# Altium PCB NE555DWTZD.PcbDoc
Units mil, origin at the board's own origin, x right, y up, seen from the top; angles counter-clockwise.
Board outline 6000 x 4000 mil, 2 copper layers (Top Layer, Bottom Layer); 8 components, 10 nets, 24 pads, 0 vias.
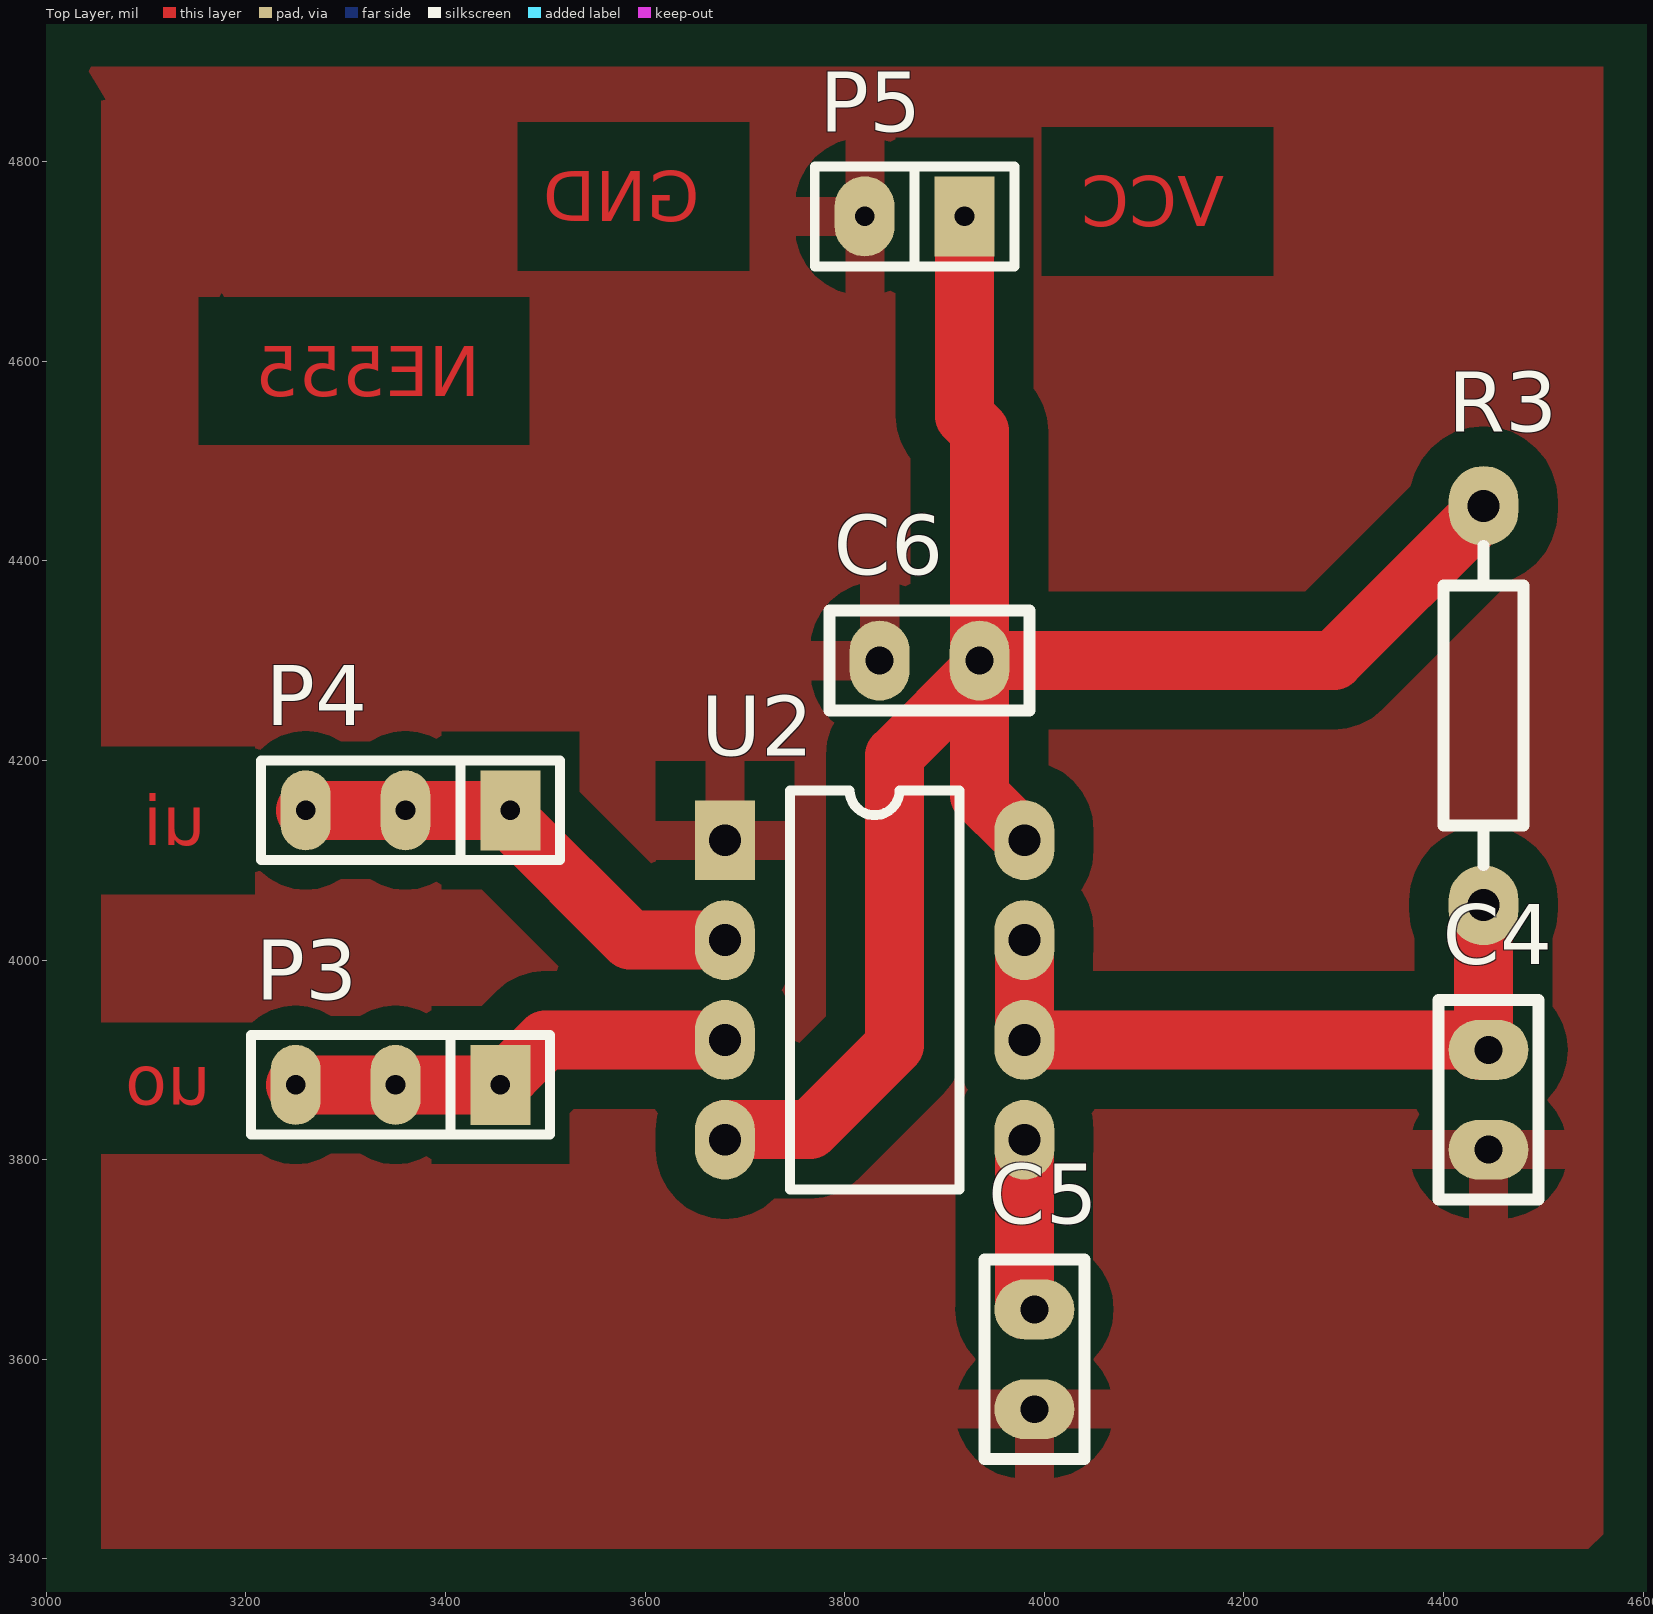
[diagram p0: Top Layer view]
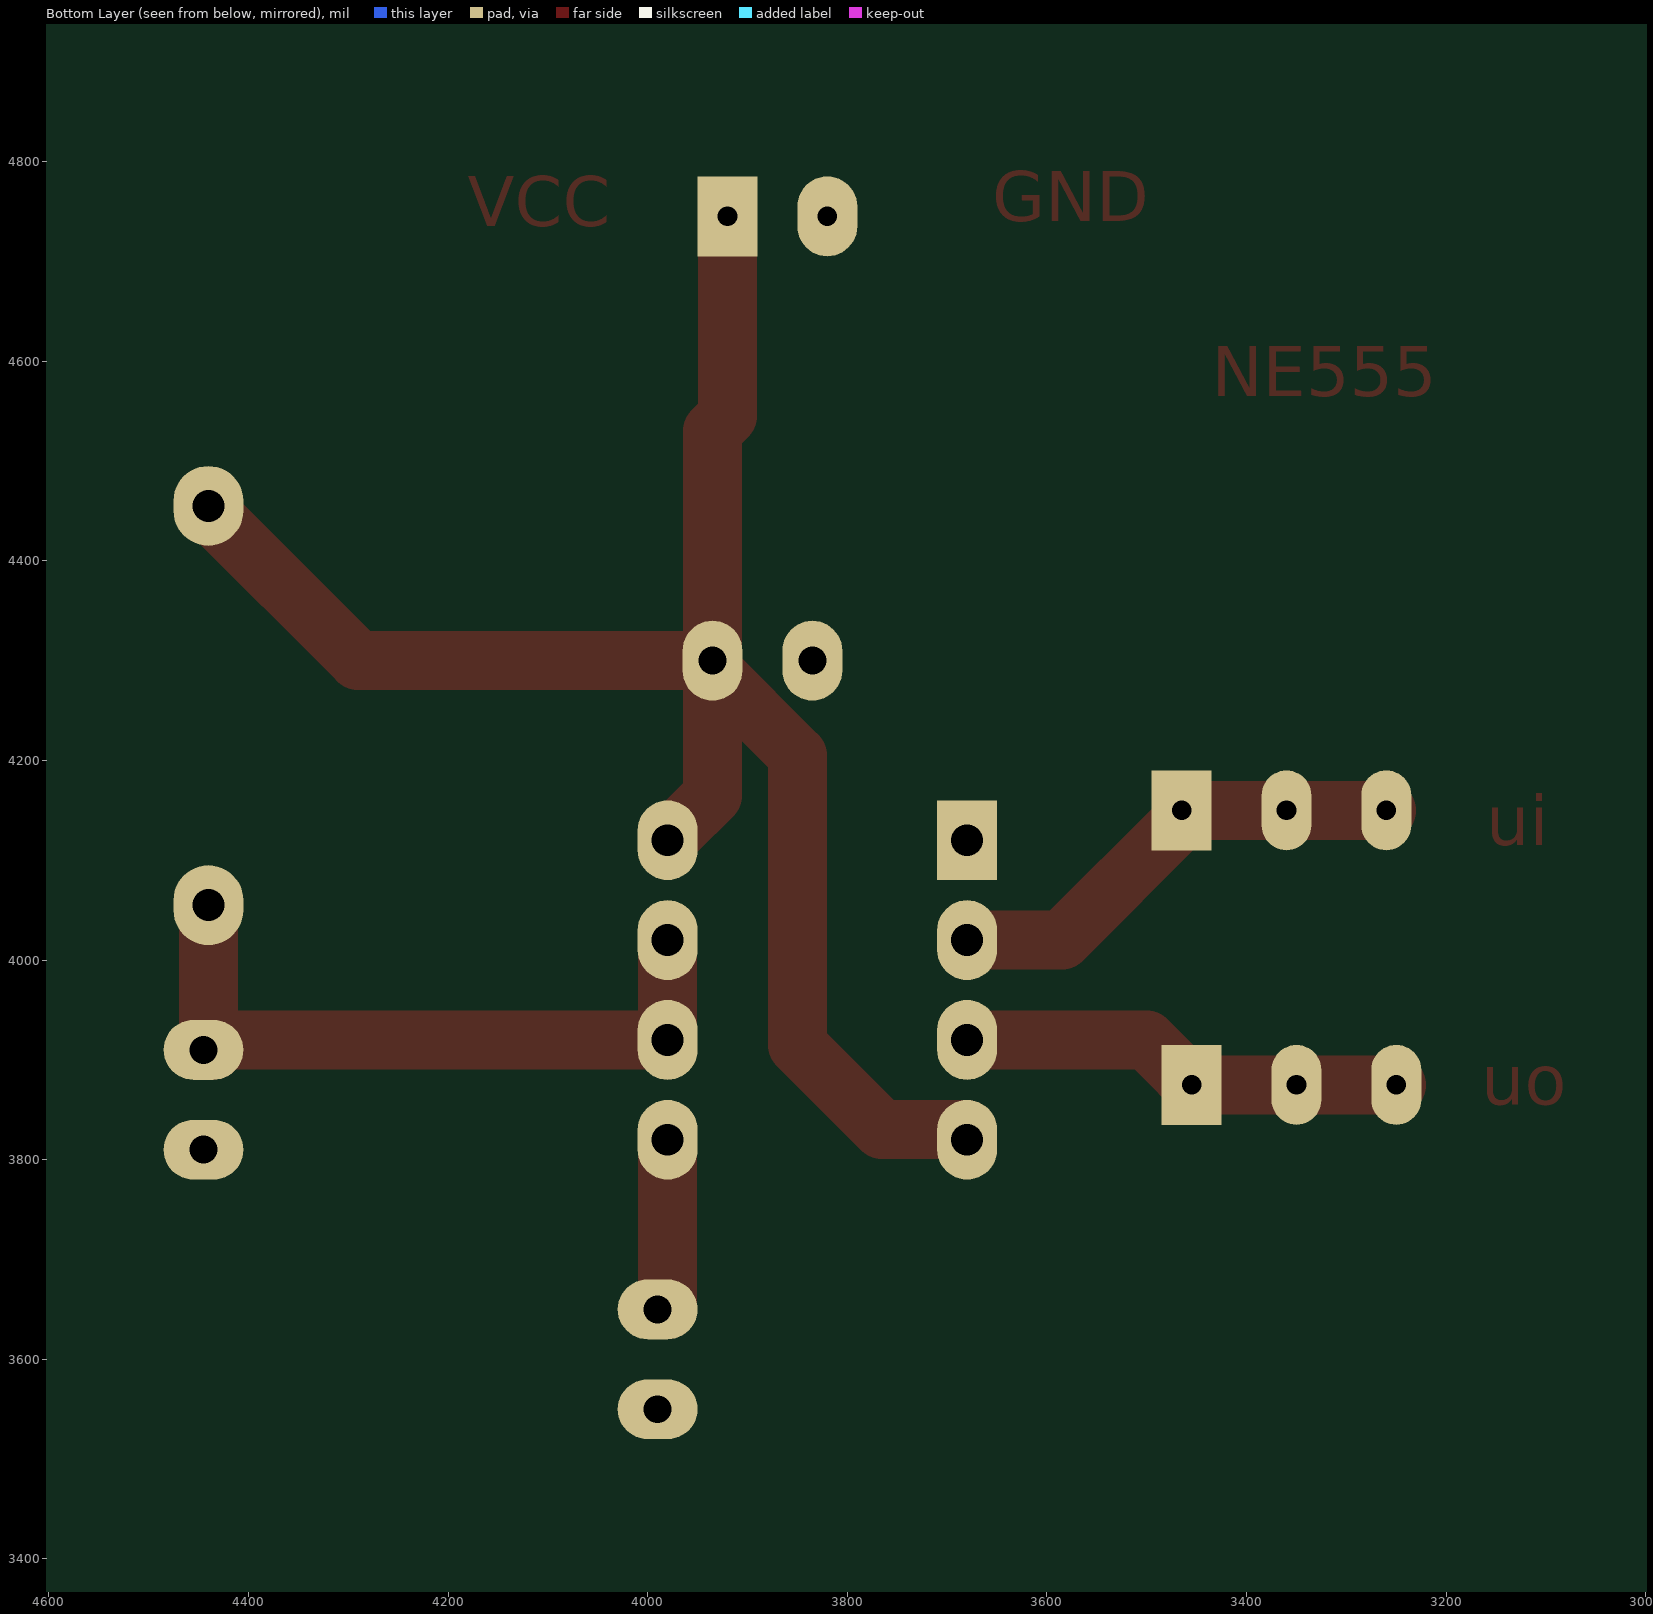
[diagram p1: Bottom Layer view, seen from below]

## Layer stack, top to bottom
Top Solder: solder mask 0.4, Solder Resist, Dk 3.5
Top Layer: signal copper 1.4
Dielectric 1: dielectric 12.6, FR-4, Dk 4.8
Bottom Layer: signal copper 1.4
Bottom Solder: solder mask 0.4, Solder Resist, Dk 3.5

## Board outline
1000,1000 7000,1000 7000,5000 1000,5000

## Design rules (kind name [scope] priority, off if disabled: settings)
Clearance [All] p1: gap=39.37 ignorepadtopadclearanceinfootprint=FALSE
PolygonConnect [All] p1: connectstyle=Relief reliefconductorwidth=39.37 reliefentries=4 polygonreliefangle="90 Angle" airgapwidth=39.37
RoutingVias [All] p1: holewidth=28 width=50 viastyle="Through Hole" minholewidth=28 minwidth=50 maxholewidth=28 maxwidth=50
SolderMaskExpansion [All] p1: expansion=4 istentingtop=FALSE
Width [All] p1: maxlimit=78.74 minlimit=10 preferedwidth=59.06
30 further rules are at their usual default settings.

## Components (designator, comment, footprint, x,y, rotation, side; value= is the part's Value field where it differs from the comment)
C4 "CAP" RAD0.1 4445,3860 r270 top
C5 "0.01u" RAD0.1 3990,3600 r270 top
C6 "104" RAD0.1 3885,4300 r180 top
P3 "3pin" 3PIN排针 3455,3875 r180 top
P4 "3pin" 3PIN排针 3465,4150 r180 top
P5 "2pin" 2pin针 3920,4745 r180 top
R3 "RES" AXIAL0.4 4440,4255 r90 top
U2 "NE555" 8pin座 3680,4120 r0 top

## Footprints (in the part's own frame and the unit in brackets; to place one, negate y for a bottom-side part, rotate by r counter-clockwise, add the part's x,y. Pads: shape width x height; smd on the part's side, far side on the other; paste and mask are expansions set on the pad)
2pin针 [mil]
  rect 60x80 hole 19.68: 1(0,0)
  oval 60x80 hole 19.68: 2(100,0)
  silkscreen extent -50,-50 150,50
3PIN排针 [mil]
  rect 60x80 hole 19.68: 1(0,0)
  oval 50x80 hole 19.68: 2(105,0) 3(205,0)
  silkscreen extent -50,-50 250,50
8pin座 [mil]
  rect 60x80 hole 32: 1(0,0)
  oval 60x80 hole 32: 2(0,-100) 3(0,-200) 4(0,-300) 5(300,-300) 6(300,-200) 7(300,-100) 8(300,0)
  silkscreen extent 65,-350 235,50
AXIAL0.4 [mil]
  oval 80x70 hole 32: 1(-200,0) 2(200,0)
  silkscreen extent -160,-40 160,40
RAD0.1 [mil]
  oval 60x80 hole 28: 1(-50,0) 2(50,0)
  silkscreen extent -100,-50 100,50

## Part data
C5 C6: library part CAP

## Nets (pads, with @x,y where several pads share a name; then routed paths per layer and width w, separated by ;. In a path a pad name is that pad's centre, name@x,y a point inside that pad or via, vN(x,y) a via of type N, cw(c..) or ccw(c..) an arc to the next point about the centre after c; other vN are vias at no path point)
GND: C4.2 C5.2 C6.2 P5.2 U2.1
NetC2_1: 
NetC3_1: 
NetC4_1: C4.1 R3.1 U2.6 U2.7 | length 714.3
  Top Layer w59.06: U2.7 U2.6 4424.74,3920 4434.74,3910 C4.1@4440.44,3910 ; R3.1 4440,3910.44 C4.1@4440.44,3910 ; C4.1 C4.1@4440.44,3910
NetC5_1: C5.1 U2.5 | length 179.7
  Top Layer w59.06: U2.5 3980,3650.44 3980.44,3650 C5.1
NetP2_1: 
NetP3_1: P3.1 P3.2 P3.3 U2.3 | length 454.5
  Top Layer w59.06: P3.3 P3.2 P3.1 3455,3885 3455.47,3885.47 3465.47,3885.47 3500,3920 U2.3
NetP4_1: P4.1 P4.2 P4.3 U2.2 | length 479.7
  Top Layer w59.06: P4.3 P4.2 P4.1 3465,4140 3585,4020 U2.2
NetR1_1: 
VCC: C6.1 P5.1 R3.2 U2.4 U2.8 | length 1835.3
  Top Layer w59.06: U2.4 3680,3829.74 3680.44,3830.18 3765.41,3830.18 3850.11,3914.89 3850.11,4205.11 C6.1@3935,4290 ; P5.1 3920,4545 3935,4530 C6.1 ; U2.8@3971.47,4128.53 3935,4165 C6.1@3935,4290 ; R3.2 4440,4450 4290,4300 C6.1 ; C6.1@3935,4290 C6.1

## Polygon pours and split planes (outlines as drawn)
GND on Top Layer "GND_L01_P000" (solid, pour order 0): 3040,4895 4560,4895 4560,3425 4545,3410 3055,3410 3055,4870 3245,4553.33
GND on Top Layer "GND_L01_P001" (solid, pour order 1): 3285,4535

## Other copper
Top Layer:
  text "GND" at 3655,4740 h50
  text "VCC" at 4180,4735 h50
  text "NE555" at 3435,4565 h50
  text "ui" at 3160,4115 h50
  text "uo" at 3165,3855 h50